# Altium PCB PCB.PcbDoc
Units mm, origin at the board's own origin, x right, y up, seen from the top; angles counter-clockwise.
Board outline 60 x 100 mm, 2 copper layers (Top Layer, Bottom Layer); 62 components, 32 nets, 190 pads, 48 vias.
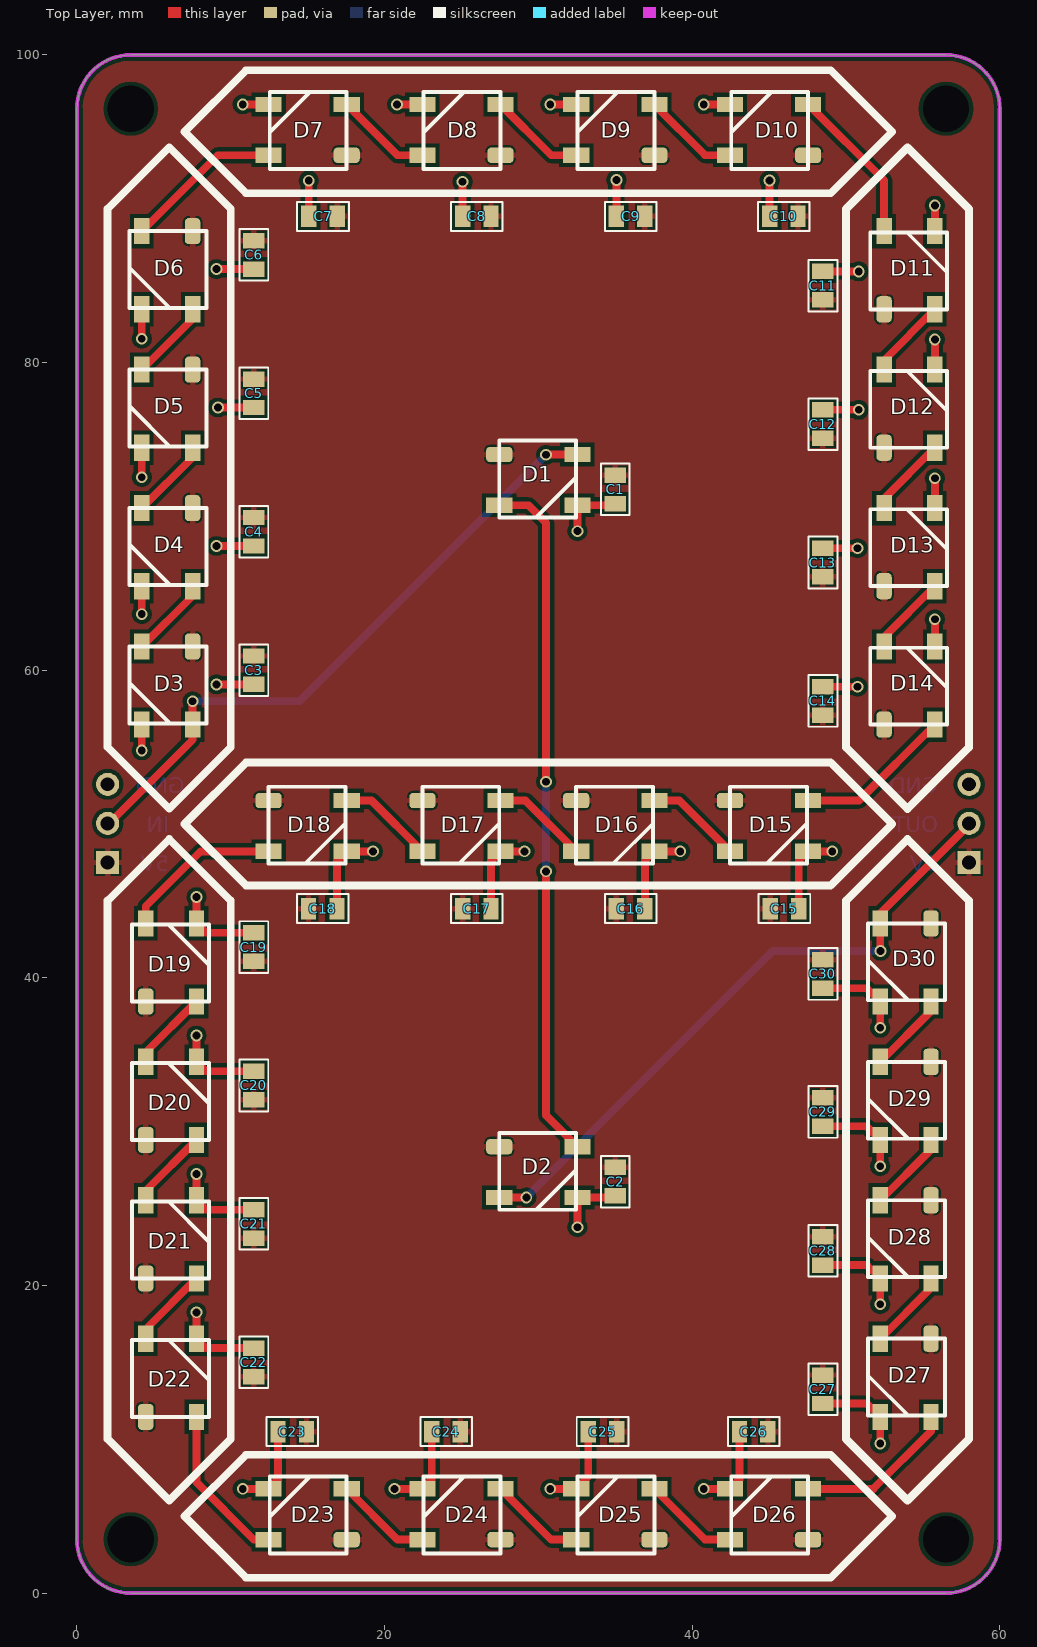
[diagram p0: Top Layer view]
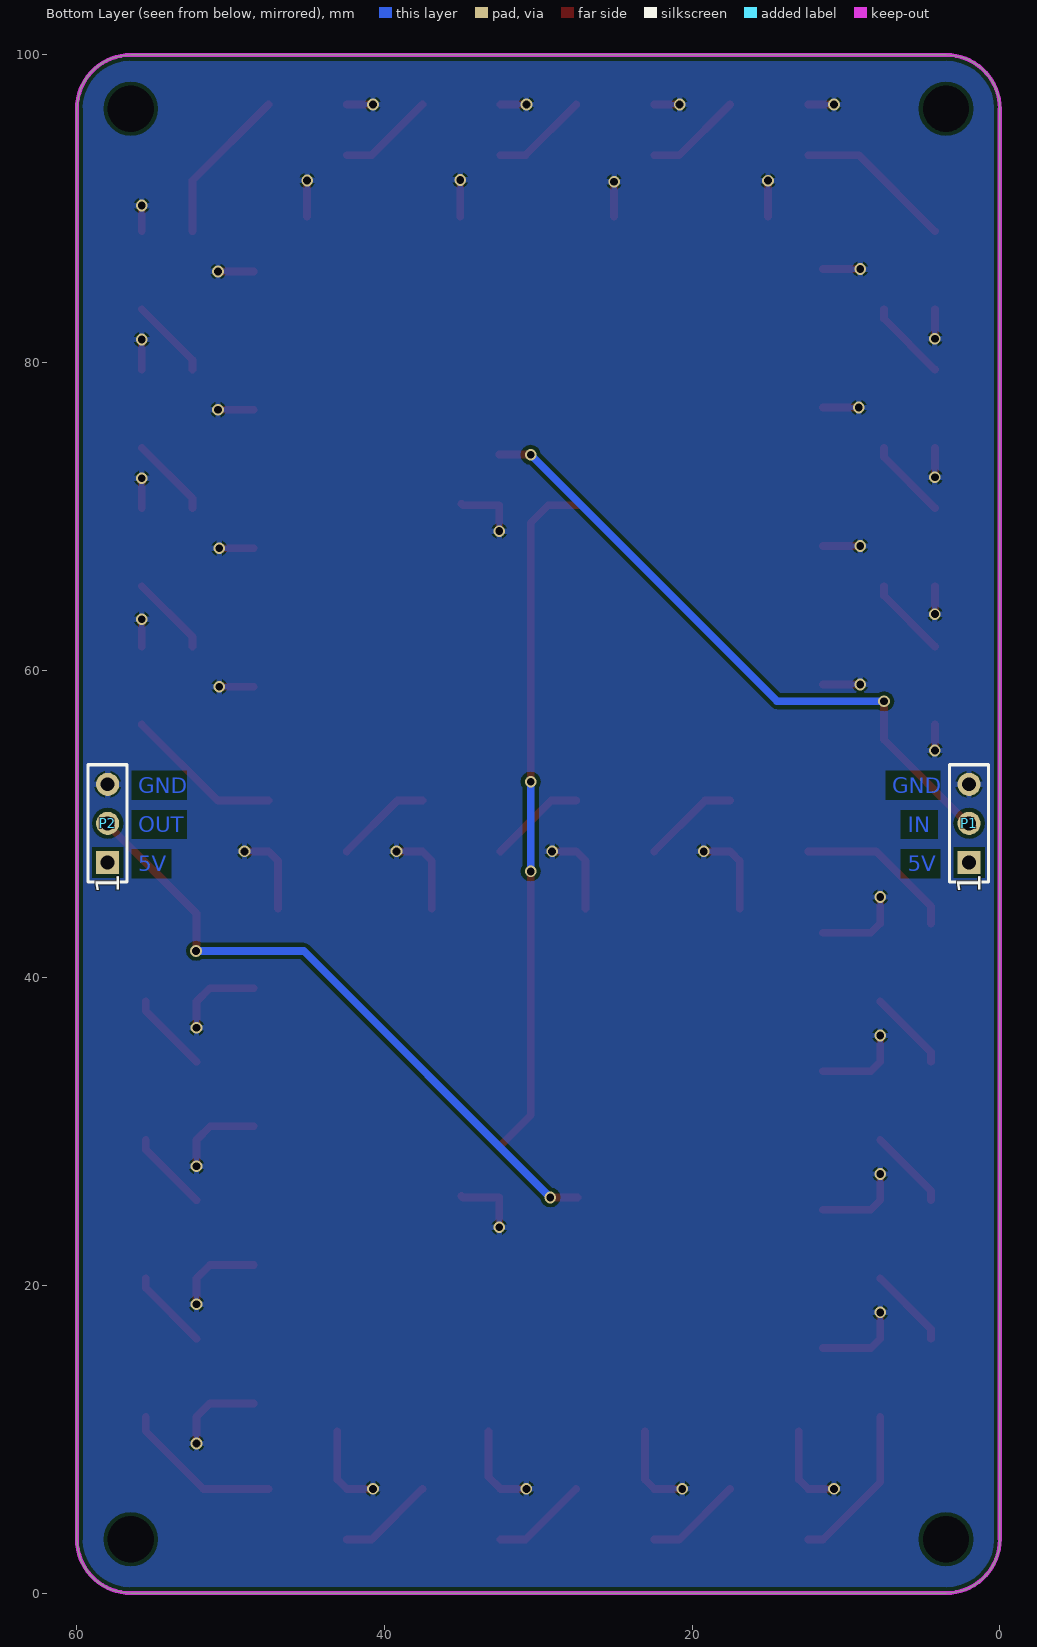
[diagram p1: Bottom Layer view, seen from below]
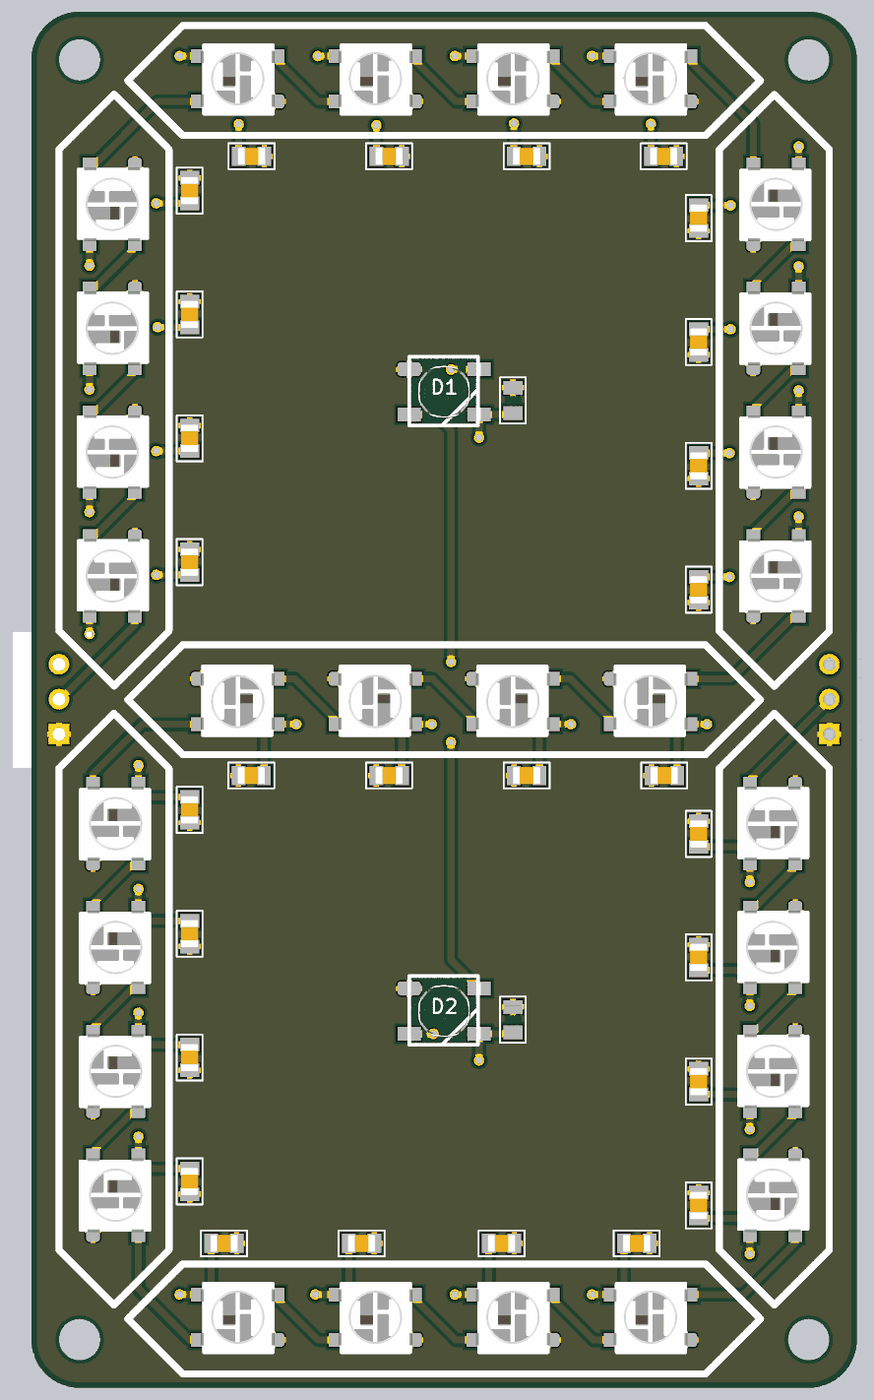
[diagram p2: 3D render of the assembled board from above, using the file's embedded part models]

## Layer stack, top to bottom
Top Solder: solder mask 0.0102, Solder Resist, Dk 3.5
Top Layer: signal copper 0.0356
Dielectric 1: dielectric 0.32, FR-4, Dk 4.8
Bottom Layer: signal copper 0.0356
Bottom Solder: solder mask 0.0102, Solder Resist, Dk 3.5

## Board outline
3.5,0 cw(c3.5,3.5) 0,3.5 0,96.5 cw(c3.5,96.5) 3.5,100 56.5,100 cw(c56.5,96.5) 60,96.5 60,3.5 cw(c56.5,3.5) 56.5,0

## Design rules (kind name [scope] priority, off if disabled: settings)
Clearance NetTies [IsNetTieComponent] p1: gap=0 ignorepadtopadclearanceinfootprint=TRUE
Clearance "Antenna Clearance" [InNetClass('Antenna') vs Not OnLayer('Keep-Out Layer')] p2: gap=0.318 ignorepadtopadclearanceinfootprint=TRUE except(1: Arc-Arc Arc-Track Track-Track)
Clearance [All] p3: gap=0.254 ignorepadtopadclearanceinfootprint=TRUE except(0: Arc-Hole Track-Hole SMDPad-Hole THPad-Hole Via-Hole Fill-Hole Poly-Hole Region-Hole Text-Hole)
ComponentClearance [All] p1: gap=0 collisioncheckmode=3 verticalgap=0 showdistances=FALSE
DiffPairsRouting [All] p1: maxlimit=0.254 minlimit=0.254 mostfreqgap=0.254 toplayer_minwidth=0.127 toplayer_maxwidth=0.635 toplayer_prefwidth=0.254 bottomlayer_minwidth=0.127 bottomlayer_maxwidth=0.635 bottomlayer_prefwidth=0.254 maxuncoupledlength=25.4
HoleSize [All] p1: absolutevalues=TRUE maxlimit=12.7 minlimit=0.025 maxpercent=80.000 minpercent=20.000
MinimumSolderMaskSliver [All] p1: minsoldermaskwidth=0
PlaneClearance [All] p1: clearance=0.254
PlaneConnect [All] p1: planeconnectstyle=Direct reliefexpansion=0.508 reliefentries=4 reliefconductorwidth=0.254 reliefairgap=0.254
PolygonConnect "Plane Connect" [OnLayer('GND') or OnLayer('PWR') vs IsVia] p1: connectstyle=Direct reliefconductorwidth=0.254 reliefentries=4 polygonreliefangle="90 Angle" airgapwidth=0.254
PolygonConnect "SMPS Connect" [HasFootprint('EM-HTSSOP14_SMD') or (HasFootprint('EM-SOT23-5_SMD'))] p2: connectstyle=Direct reliefconductorwidth=0.254 reliefentries=4 polygonreliefangle="90 Angle" airgapwidth=0.254
PolygonConnect "IC's Connect" [HasFootprint('EM-QFP64_SMD') or HasFootprint('EM-HVQFN32_SMD')] p3: connectstyle=Direct reliefconductorwidth=0.254 reliefentries=4 polygonreliefangle="90 Angle" airgapwidth=0.254
PolygonConnect "Testpoint Connect" [HasFootprint('Testpoint')] p4: connectstyle=Direct reliefconductorwidth=0.254 reliefentries=4 polygonreliefangle="90 Angle" airgapwidth=0.254
PolygonConnect [All] p5: connectstyle=Relief reliefconductorwidth=0.381 reliefentries=4 polygonreliefangle="90 Angle" airgapwidth=0.127
RoutingVias [All] p1: holewidth=0.381 width=0.508 viastyle="Through Hole" minholewidth=0.254 minwidth=0.508 maxholewidth=0.762 maxwidth=1.27
SilkToSilkClearance [All] p1: silktosilkclearance=0
SilkToSolderMaskClearance [IsPad] p1: minsilkscreentomaskgap=0.127 clearancetoexposedcopper=TRUE
SolderMaskExpansion [All] p1: expansion=0.102 istentingtop=FALSE
Width [All] p1: maxlimit=2.54 minlimit=0.127 preferedwidth=0.254
22 further rules are at their usual default settings.

## Components (designator, comment, footprint, x,y, rotation, side; value= is the part's Value field where it differs from the comment)
C1 "100nF" "EM-0805-C T1,25_SMD" 35,71.75 r90 top
C2 "100nF" "EM-0805-C T1,25_SMD" 35,26.75 r90 top
C3 "100nF" "EM-0805-C T1,25_SMD" 11.5,60 r90 top
C4 "100nF" "EM-0805-C T1,25_SMD" 11.5,69 r90 top
C5 "100nF" "EM-0805-C T1,25_SMD" 11.5,78 r90 top
C6 "100nF" "EM-0805-C T1,25_SMD" 11.5,87 r90 top
C7 "100nF" "EM-0805-C T1,25_SMD" 16,89.5 r0 top
C8 "100nF" "EM-0805-C T1,25_SMD" 26,89.5 r0 top
C9 "100nF" "EM-0805-C T1,25_SMD" 36,89.5 r0 top
C10 "100nF" "EM-0805-C T1,25_SMD" 45.957,89.5 r0 top
C11 "100nF" "EM-0805-C T1,25_SMD" 48.5,85 r270 top
C12 "100nF" "EM-0805-C T1,25_SMD" 48.5,76 r270 top
C13 "100nF" "EM-0805-C T1,25_SMD" 48.5,67 r270 top
C14 "100nF" "EM-0805-C T1,25_SMD" 48.5,58 r270 top
C15 "100nF" "EM-0805-C T1,25_SMD" 46,44.5 r180 top
C16 "100nF" "EM-0805-C T1,25_SMD" 36,44.5 r180 top
C17 "100nF" "EM-0805-C T1,25_SMD" 26,44.5 r180 top
C18 "100nF" "EM-0805-C T1,25_SMD" 15.982,44.5 r180 top
C19 "100nF" "EM-0805-C T1,25_SMD" 11.5,42 r270 top
C20 "100nF" "EM-0805-C T1,25_SMD" 11.5,33 r270 top
C21 "100nF" "EM-0805-C T1,25_SMD" 11.5,24 r270 top
C22 "100nF" "EM-0805-C T1,25_SMD" 11.5,15 r270 top
C23 "100nF" "EM-0805-C T1,25_SMD" 14,10.5 r0 top
C24 "100nF" "EM-0805-C T1,25_SMD" 24,10.5 r0 top
C25 "100nF" "EM-0805-C T1,25_SMD" 34.173,10.5 r0 top
C26 "100nF" "EM-0805-C T1,25_SMD" 44,10.5 r0 top
C27 "100nF" "EM-0805-C T1,25_SMD" 48.5,13.25 r90 top
C28 "100nF" "EM-0805-C T1,25_SMD" 48.5,22.25 r90 top
C29 "100nF" "EM-0805-C T1,25_SMD" 48.5,31.279 r90 top
C30 "100nF" "EM-0805-C T1,25_SMD" 48.5,40.25 r90 top
D1 "WS2812" WS2812B 30,72.5 r0 top
D2 "WS2812" WS2812B 30,27.5 r0 top
D3 "WS2812" WS2812B 6,59 r270 top
D4 "WS2812" WS2812B 6,68 r270 top
D5 "WS2812" WS2812B 6,77 r270 top
D6 "WS2812" WS2812B 6,86 r270 top
D7 "WS2812" WS2812B 15,95 r180 top
D8 "WS2812" WS2812B 25,95 r180 top
D9 "WS2812" WS2812B 35,95 r180 top
D10 "WS2812" WS2812B 45,95 r180 top
D11 "WS2812" WS2812B 54,86 r90 top
D12 "WS2812" WS2812B 54,77 r90 top
D13 "WS2812" WS2812B 54,68 r90 top
D14 "WS2812" WS2812B 54,59 r90 top
D15 "WS2812" WS2812B 45,50 r0 top
D16 "WS2812" WS2812B 35,50 r0 top
D17 "WS2812" WS2812B 25,50 r0 top
D18 "WS2812" WS2812B 15,50 r0 top
D19 "WS2812" WS2812B 6,41 r90 top
D20 "WS2812" WS2812B 6,32 r90 top
D21 "WS2812" WS2812B 6,23 r90 top
D22 "WS2812" WS2812B 6,14 r90 top
D23 "WS2812" WS2812B 15,5 r180 top
D24 "WS2812" WS2812B 25,5 r180 top
D25 "WS2812" WS2812B 35,5 r180 top
D26 "WS2812" WS2812B 45,5 r180 top
D27 "WS2812" WS2812B 54,14 r270 top
D28 "WS2812" WS2812B 54,23 r270 top
D29 "WS2812" WS2812B 54,32 r270 top
D30 "WS2812" WS2812B 54,41 r270 top
P1 "Pin Header 1X3P" "CON Header 1X3" 2,47.5 r90 bottom value="Pin Header 1x3P"
P2 "Pin Header 1X3P" "CON Header 1X3" 58,47.5 r90 bottom value="Pin Header 1x3P"

## Footprints (in the part's own frame and the unit in brackets; to place one, negate y for a bottom-side part, rotate by r counter-clockwise, add the part's x,y. Pads: shape width x height; smd on the part's side, far side on the other; paste and mask are expansions set on the pad)
"CON Header 1X3" [mm] "Header - MC"
  rect 1.5x1.5 hole 0.9: 1(0,0)
  round 1.5 hole 0.9: 2(2.54,0) 3(5.08,0)
  silkscreen extent -1.27,-1.27 6.35,1.27, body extent -2.45,-3.37 7.45,2.38, height 7
"EM-0805-C T1,25_SMD" [mm] "Chip Capacitor, 2-Leads, Body 2,00x1,25mm, IPC Medium Density"
  rect 1x1.4 smd: 1(-0.925,0) 2(0.925,0)
  silkscreen extent -1.68,-0.94 1.68,0.94, body extent -1,-0.63 1,0.63, height 1.25
WS2812B [mm]
  rrect50% 1.7x1 smd: 1(-2.54,1.524)
  rect 1.7x1 smd: 2(-2.54,-1.778) 3(2.54,-1.778) 4(2.54,1.524)
  silkscreen extent -2.54,-2.58 2.46,2.42, body extent -2.68,-2.6 2.68,2.35, height 1.5

## Part data
C1 C2 C3 C4 C5 C6 C7 C8 C9 C10 C11 C12 C13 C14 C15 C16 C17 C18 C19 C20 C21 C22 C23 C24 C25 C26 C27 C28 C29 C30: library part Capacitor, "Capacitor", Manufacturer Name=Farnell, Tolerance=+-5%, Diëlectricum=X7R, Unit Price (€)=0.1
P1 P2: library part "Pin Header 3", "Header 3-Pin", Type="Pin Header 1x3P", Unit Price (€)=?

## Free pads (board coordinates)
  round 1.524 hole 3 unplated: 1(3.5,3.5) 2(3.5,96.5) 3(56.5,96.5) 4(56.5,3.5)

## Via types
v1: diameter 0.762, hole 0.508, Top Layer to Bottom Layer, 48 vias

## Nets (pads, with @x,y where several pads share a name; then routed paths per layer and width w, separated by ;. In a path a pad name is that pad's centre, name@x,y a point inside that pad or via, vN(x,y) a via of type N, cw(c..) or ccw(c..) an arc to the next point about the centre after c; other vN are vias at no path point)
5V: C1.2 C2.2 C3.2 C4.2 C5.2 C6.2 C7.2 C8.2 C9.2 C10.2 C11.2 C12.2 C13.2 C14.2 C15.2 C16.2 C17.2 C18.2 C19.2 C20.2 C21.2 C22.2 C23.2 C24.2 C25.2 C26.2 C27.2 C28.2 C29.2 C30.2 D1.1 D2.1 D3.1 D4.1 D5.1 D6.1 D7.1 D8.1 D9.1 D10.1 D11.1 D12.1 D13.1 D14.1 D15.1 D16.1 D17.1 D18.1 D19.1 D20.1 D21.1 D22.1 D23.1 D24.1 D25.1 D26.1 D27.1 D28.1 D29.1 D30.1 P1.1 P2.1
GND: C1.1 C2.1 C3.1 C4.1 C5.1 C6.1 C7.1 C8.1 C9.1 C10.1 C11.1 C12.1 C13.1 C14.1 C15.1 C16.1 C17.1 C18.1 C19.1 C20.1 C21.1 C22.1 C23.1 C24.1 C25.1 C26.1 C27.1 C28.1 C29.1 C30.1 D1.3 D2.3 D3.3 D4.3 D5.3 D6.3 D7.3 D8.3 D9.3 D10.3 D11.3 D12.3 D13.3 D14.3 D15.3 D16.3 D17.3 D18.3 D19.3 D20.3 D21.3 D22.3 D23.3 D24.3 D25.3 D26.3 D27.3 D28.3 D29.3 D30.3 P1.3 P2.3 | length 149.3
  Top Layer w0.508: v1(4.222,54.778) D3.3 ; v1(4.222,63.643) D4.3 ; v1(4.222,72.548) D5.3 ; v1(4.222,81.548) D6.3 ; v1(7.778,18.25) D22.3 8.393,15.925 C22.1 ; v1(7.778,27.25) D21.3 8.393,24.925 C21.1 ; v1(7.778,36.25) D20.3 8.393,33.925 C20.1 ; v1(7.778,45.25) D19.3 8.393,42.925 C19.1 ; v1(9.075,59.075) C3.1 ; v1(9.075,68.075) C4.1 ; v1(9.075,86.075) C6.1 ; v1(9.175,77.075) C5.1 ; v1(10.778,6.778) D23.3 13.075,7.393 C23.1 ; v1(10.778,96.778) D7.3 ; C7.1 v1(15.075,91.825) ; C18.1 16.907,47.589 D18.3 v1(19.25,48.222) ; v1(20.644,6.778) D24.3 23.075,7.393 C24.1 ; v1(20.816,96.778) D8.3 ; C8.1 v1(25.075,91.75) ; C17.1 26.925,47.607 D17.3 v1(29.105,48.222) ; v1(30.776,96.778) D9.3 ; v1(30.778,6.778) D25.3 33.248,7.566 C25.1 ; v1(32.54,23.79) D2.3 34.897,25.722 C2.1 ; v1(32.54,69.04) D1.3 34.897,70.722 C1.1 ; C9.1 v1(35.075,91.873) ; C16.1 36.925,47.607 D16.3 v1(39.222,48.222) ; v1(40.75,6.778) D26.3 43.075,7.393 C26.1 ; v1(40.75,96.778) D10.3 ; C10.1 v1(45.032,91.841) ; C15.1 46.925,47.607 D15.3 v1(49.106,48.222) ; C27.1 51.357,12.325 D27.3 v1(52.222,9.722) ; C28.1 51.357,21.325 D28.3 v1(52.222,18.778) ; C29.1 51.328,30.354 D29.3 v1(52.222,27.75) ; C30.1 51.357,39.325 D30.3 v1(52.222,36.75) ; C14.1 v1(50.75,58.925) ; C13.1 v1(50.75,67.925) ; C12.1 v1(50.825,76.925) ; C11.1 v1(50.825,85.925) ; D14.3 v1(55.778,63.309) ; D13.3 v1(55.778,72.472) ; D12.3 v1(55.778,81.5) ; D11.3 v1(55.778,90.202)
NetD1_2: D1.2 D2.4 | length 44.9
  Top Layer w0.508: D1.2 29.356,70.722 30.5,69.578 v1(30.5,52.75) ; v1(30.5,46.92) 30.5,31.064 D2.4
  Bottom Layer w0.508: v1(30.5,46.92) v1(30.5,52.75)
NetD1_4: D1.4 D3.4 P1.2 | length 42
  Top Layer w0.508: P1.2@2,49.96 7.524,55.484 D3.4 v1(7.524,57.976) ; v1(30.5,74) 30.524,74.024 D1.4
  Bottom Layer w0.508: v1(7.524,57.976) 14.476,57.976 v1(30.5,74)
NetD2_2: D2.2 D30.2 P2.2 | length 42
  Top Layer w0.508: D2.2 v1(29.222,25.722) ; v1(52.25,41.75) 52.222,41.778 D30.2 52.222,44.182 P2.2@58,49.96
  Bottom Layer w0.508: v1(29.222,25.722) 45.25,41.75 v1(52.25,41.75)
NetD3_2: D3.2 D4.4 | length 5.3
  Top Layer w0.508: D3.2 7.524,64.842 D4.4
NetD4_2: D4.2 D5.4 | length 5.3
  Top Layer w0.508: D4.2 7.524,73.842 D5.4
NetD5_2: D5.2 D6.4 | length 5.3
  Top Layer w0.508: D5.2 7.524,82.842 D6.4
NetD6_2: D6.2 D7.4 | length 10.3
  Top Layer w0.508: D6.2 9.158,93.476 D7.4
NetD7_2: D7.2 D8.4 | length 6.3
  Top Layer w0.508: D7.2 20.842,93.476 D8.4
NetD8_2: D8.2 D9.4 | length 6.3
  Top Layer w0.508: D8.2 30.842,93.476 D9.4
NetD9_2: D9.2 D10.4 | length 6.3
  Top Layer w0.508: D9.2 40.842,93.476 D10.4
NetD10_2: D10.2 D11.4 | length 10.3
  Top Layer w0.508: D10.2 52.476,91.842 D11.4
NetD11_2: D11.2 D12.4 | length 5.3
  Top Layer w0.508: D12.4 52.476,80.158 D11.2
NetD12_2: D12.2 D13.4 | length 5.3
  Top Layer w0.508: D13.4 52.476,71.158 D12.2
NetD13_2: D13.2 D14.4 | length 5.3
  Top Layer w0.508: D14.4 52.476,62.158 D13.2
NetD14_2: D14.2 D15.4 | length 10.3
  Top Layer w0.508: D15.4 50.842,51.524 D14.2
NetD15_2: D15.2 D16.4 | length 6.3
  Top Layer w0.508: D16.4 39.158,51.524 D15.2
NetD16_2: D16.2 D17.4 | length 6.3
  Top Layer w0.508: D17.4 29.158,51.524 D16.2
NetD17_2: D17.2 D18.4 | length 6.3
  Top Layer w0.508: D18.4 19.158,51.524 D17.2
NetD18_2: D18.2 D19.4 | length 10.6
  Top Layer w0.508: D19.4 4.476,44.645 8.053,48.222 D18.2
NetD19_2: D19.2 D20.4 | length 5.3
  Top Layer w0.508: D20.4 4.476,35.158 D19.2
NetD20_2: D20.2 D21.4 | length 5.3
  Top Layer w0.508: D21.4 4.476,26.158 D20.2
NetD21_2: D21.2 D22.4 | length 5.3
  Top Layer w0.508: D22.4 4.476,17.158 D21.2
NetD22_2: D22.2 D23.4 | length 10.5
  Top Layer w0.508: D22.2 7.778,7.201 11.503,3.476 D23.4
NetD23_2: D23.2 D24.4 | length 6.3
  Top Layer w0.508: D23.2 20.842,3.476 D24.4
NetD24_2: D24.2 D25.4 | length 6.3
  Top Layer w0.508: D24.2 30.842,3.476 D25.4
NetD25_2: D25.2 D26.4 | length 6.3
  Top Layer w0.508: D25.2 40.842,3.476 D26.4
NetD26_2: D26.2 D27.4 | length 10.5
  Top Layer w0.508: D26.2 51.778,6.778 55.524,10.524 D27.4
NetD27_2: D27.2 D28.4 | length 5.3
  Top Layer w0.508: D27.2 55.524,19.842 D28.4
NetD28_2: D28.2 D29.4 | length 5.3
  Top Layer w0.508: D28.2 55.524,28.842 D29.4
NetD29_2: D29.2 D30.4 | length 5.3
  Top Layer w0.508: D29.2 55.524,37.842 D30.4

## Polygon pours and split planes (outlines as drawn)
5V on Top Layer "Top Layer-5V" (solid, remove dead copper, pour order 1): 0,0 60,0 60,100 0,100
GND on Bottom Layer "Bottom Layer-GND" (solid, remove dead copper, pour order 3): 0,0 0,100 60,100 60,0

## Keep-outs
Keep-Out Layer:
  the board outline again, w0.254

## Other copper
Bottom Layer:
  text "GND" at 7,52 h1.02
  text "GND" at 56,52 h1.02
  text "IN" at 6,49.46 h1.02
  text "OUT" at 56,49.46 h1.02
  text "5V" at 6,46.92 h1.02
  text "5V" at 56,46.92 h1.02

## Silkscreen, mask and mechanical layers (free items; w line width, h text height)
Top Overlay:
  lines w0.508: 2,10.019 2,45.019 6,49.019 10,45.019 10,10.019 6,6.019 2,10.019 ; 2,55 2,90 6,94 10,90 10,55 6,51 2,55 ; 7,5 11,1 49,1 53,5 49,9 11,9 7,5 ; 7,50 11,54 49,54 53,50 49,46 11,46 7,50 ; 7,95 11,91 49,91 53,95 49,99 11,99 7,95 ; 50,10.019 50,45.019 54,49.019 58,45.019 58,10.019 54,6.019 50,10.019 ; 50,54.981 54,50.981 58,54.981 58,89.981 54,93.981 50,89.981 50,54.981

## Text inside footprints (layer, text, board x,y; h text height)
P1: Bottom Overlay "1" at 1.238,45.468 h1.52 r270
P2: Bottom Overlay "1" at 57.238,45.468 h1.52 r270